# EAGLE board aixplorer_battery_pack (EAGLE 6.3)
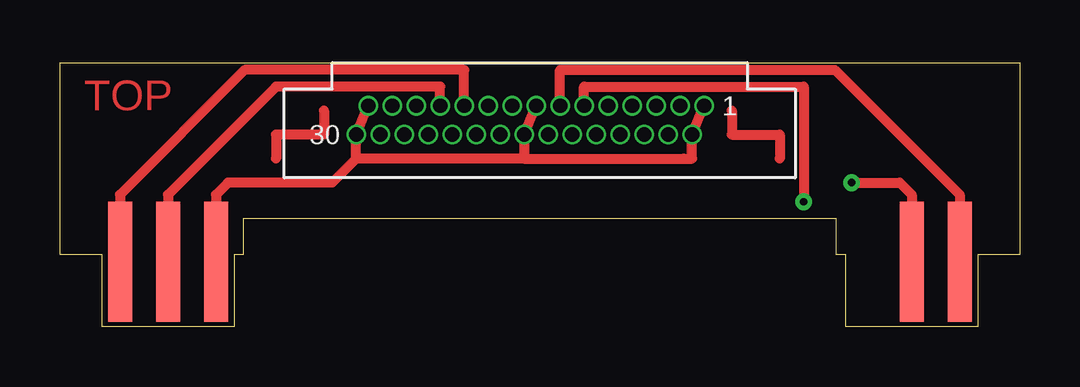
[diagram p0: board, top side]
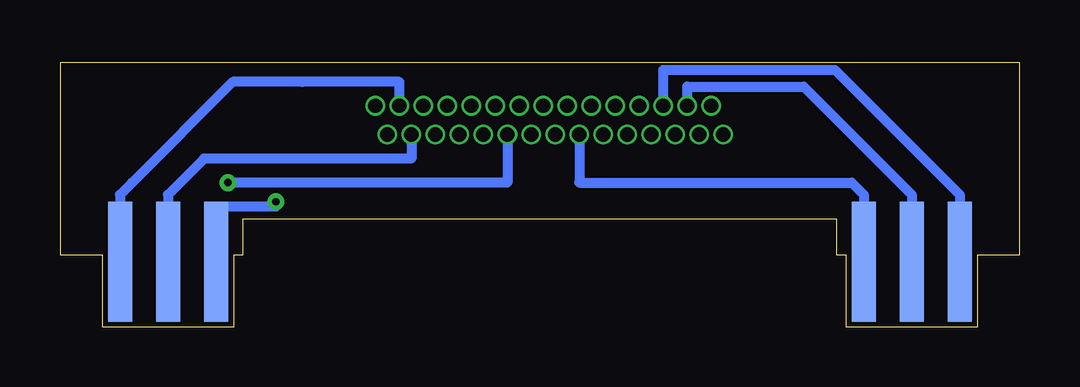
[diagram p1: board, bottom side, seen from below]

Size 40 x 11 mm. Coordinates in mm from the lower left corner, seen from the top.
Copper layers (1*16): Top 0.035mm / dielectric 1.5mm / Bottom 0.035mm
Design rules "default *": minimum track width 10mil, minimum drill 24mil, track to track 8mil, track to pad 8mil, pad to pad 8mil, via to via 8mil, smd to smd 8mil, copper to edge 40mil, drill to drill 8mil, minimum pad ring 1mil, minimum via ring 8mil, stop-mask expansion 4mil, vias tented up to drill 0mil, thermal gap 10mil

## Footprints (pad centres in the part's own frame; a part is rotated, then mirrored left to right if it is on the bottom)
IPOD_CONNECTOR_MALE_UPRIGHT = drill 0.6 pad 0.825: P$1 -6.85,-0.6; P$2 -6.35,0.6; P$3 -5.85,-0.6; P$4 -5.35,0.6; P$5 -4.85,-0.6; P$6 -4.35,0.6; P$7 -3.85,-0.6; P$8 -3.35,0.6; P$9 -2.85,-0.6; P$10 -2.35,0.6; P$11 -1.85,-0.6; P$12 -1.35,0.6; P$13 -0.85,-0.6; P$14 -0.35,0.6; P$15 0.15,-0.6; P$16 0.65,0.6; P$17 1.15,-0.6; P$18 1.65,0.6; P$19 2.15,-0.6; P$20 2.65,0.6; P$21 3.15,-0.6; P$22 3.65,0.6; P$23 4.15,-0.6; P$24 4.65,0.6; P$25 5.15,-0.6; P$26 5.65,0.6; P$27 6.15,-0.6; P$28 6.65,0.6; P$29 7.15,-0.6; P$30 7.65,0.6
BATTERY_ADAPTER = smd 1 x 5: P$1 -17.5,-0.3; P$2 -15.5,-0.3; P$3 15.5,-0.3; P$4 17.5,-0.3; P$9 -13.5,-0.3 | smd 1 x 5 bottom: P$5 -17.5,-0.3; P$6 -15.5,-0.3; P$7 15.5,-0.3; P$8 17.5,-0.3; P$10 -13.5,-0.3; P$11 13.5,-0.3

## Placement (x,y rotation side)
U$1  IPAD_CONNECTOR_MALEP  [IPOD_CONNECTOR_MALE_UPRIGHT]  20,8.6 180 top
U$2  BATTERY_ADAPTER  [BATTERY_ADAPTER]  20,3 0 top

## Library data of the parts
U$1 U$2 = corona

## Nets
3V3: U$1.P$18 U$2.P$10
5V: U$1.P$23 U$2.P$2
ACC: U$1.P$21 U$2.P$1
AUDIO: U$1.P$11 U$2.P$11
D+: U$1.P$27 U$2.P$6
D-: U$1.P$25 U$2.P$5
GND: U$1.P$1 U$1.P$2 U$1.P$15 U$1.P$16 U$1.P$29 U$1.P$30 U$2.P$9
LOUT: U$1.P$4 U$2.P$7
ROUT: U$1.P$3 U$2.P$8
RX: U$1.P$13 U$2.P$4
TX: U$1.P$12 U$2.P$3

## Tracks (layer width: path | path; a pad name or v marks a point on that pad's centre or on a via)
3V3
  Bottom 0.406: U$1.P$18 18.35,6 7,6 6.5,5.5 U$2.P$10
5V
  Top 0.406: U$1.P$23 15.85,10 9,10 4.5,5.5 U$2.P$2
ACC
  Top 0.406: U$1.P$21 16.85,10.7 7.7,10.7 2.5,5.5 U$2.P$1
AUDIO  (via drill 0.3)
  Top 0.406: U$1.P$11 21.85,10 31,10 v31,5.2
  Bottom 0.406: v31,5.2 31,5 33.5,5 U$2.P$11
D+
  Bottom 0.406: U$1.P$27 13.85,10 9,10 4.5,5.5 U$2.P$6
D-
  Bottom 0.406: U$1.P$25 14.85,10.7 7.7,10.7 2.5,5.5 U$2.P$5
GND
  Top 0.406: U$1.P$1 U$1.P$2 26.35,7 26,7 19.35,7 | U$1.P$16 U$1.P$15 | U$1.P$29 U$1.P$30 12.35,7 | U$1.P$16 19.35,7 | U$1.P$16 19.35,7 | 19.35,7 13,7 12.35,7 | 12.35,7 11.35,6 7,6 6.5,5.5 U$2.P$9
LOUT
  Bottom 0.406: U$1.P$4 25.35,7 34,7 35.5,5.5 U$2.P$7
N$1
  Top 0.406: 11,9 11,8 9,8 9,7
N$2
  Top 0.406: 28,9 28,8 30,8 30,7
ROUT
  Bottom 0.406: U$1.P$3 25.85,10.2 29.9,10.2 32.8,10.2 37,6 37.5,5.5 U$2.P$8
RX
  Top 0.406: U$1.P$13 20.85,10.7 32.3,10.7 37.5,5.5 U$2.P$4
TX  (via drill 0.3)
  Top 0.406: v33,6 35,6 35.5,5.5 U$2.P$3
  Bottom 0.406: U$1.P$12 21.35,6 v33,6

## Text on the board
Top: TOP
tStop: TOP